# EAGLE board Feed Me Human! (EAGLE 9.7.0)

Size 181.78 x 142.44 mm. Coordinates in mm from the lower left corner, seen from the top.
Outline: 0,0 181.78,0 181.78,142.44 0,142.44 0,0
Copper layers (1*16): Top 0.035mm / dielectric 1.5mm / Bottom 0.035mm
Design rules "default": minimum track width 6mil, minimum drill 0.35mm, track to track 6mil, track to pad 6mil, pad to pad 6mil, via to via 6mil, smd to smd 6mil, copper to edge 40mil, drill to drill 6mil, minimum pad ring 10mil, minimum via ring 8mil, stop-mask expansion 4mil, vias tented up to drill 0mil, thermal gap 10mil

## Footprints (pad centres in the part's own frame; a part is rotated, then mirrored left to right if it is on the bottom)
LEDRD254W60D565H860B = drill 0.981 pad 1.581: 1 -1.27,0; 2 1.27,0
LEDRD254W60D565H860B_Y = drill 0.981 pad 1.581: 1 -1.27,0; 2 1.27,0
LEDRD254W60D565H860B_G = drill 0.981 pad 1.581: 1 -1.27,0; 2 1.27,0
PIEZO = drill 1 pad 1.6: 1 -3.5,0; 2 3.5,0
RESAD1016W63L850D250B = drill 0.83 pad 1.43: 1 -5.08,0; 2 5.08,0
HA-06-SM065 = drill 1 pad 1.676: 1 -2.54,-2.54; 2 0,2.54; 3 2.54,-2.54
SWITCH-MOMENTARY-PTH-6.5MM = drill 1.016 pad 1.88: 1 -3.251,2.261; 2 3.251,2.261; 3 -3.251,-2.261; 4 3.251,-2.261
SG90 = drill 1.016 long: 1 -2.54,0; 2 0,0; 3 2.54,0
ARDUINO-UNO-R3-SHIELD = drill 1.016 pad 1.88: 3.3V 24.13,-2.54; 5V 24.13,0; A0 24.13,12.7; A1 24.13,15.24; A2 24.13,17.78; A3 24.13,20.32; A4 24.13,22.86; A5 24.13,25.4; AREF -24.13,-13.97; D2 -24.13,20.32; D3 -24.13,17.78; D4 -24.13,15.24; D5 -24.13,12.7; D6 -24.13,10.16; D7 -24.13,7.62; D8 -24.13,3.81; D9 -24.13,1.27; D10 -24.13,-1.27; D11 -24.13,-3.81; D12 -24.13,-6.35; D13 -24.13,-8.89; GND@0 24.13,2.54; GND@1 24.13,5.08; GND@2 -24.13,-11.43; IOREF 24.13,-7.62; NC 24.13,-10.16; RES 24.13,-5.08; RX -24.13,25.4; SCL -24.13,-19.05; SDA -24.13,-16.51; TX -24.13,22.86; VIN 24.13,7.62
JHD-162A = drill 1.016 long: 1 -19.05,0; 2 -16.51,0; 3 -13.97,0; 4 -11.43,0; 5 -8.89,0; 6 -6.35,0; 7 -3.81,0; 8 -1.27,0; 9 1.27,0; 10 3.81,0; 11 6.35,0; 12 8.89,0; 13 11.43,0; 14 13.97,0; 15 16.51,0; 16 19.05,0

## Placement (x,y rotation side)
D1  RED  [LEDRD254W60D565H860B]  115.53,86.28 0 top
D2  YELLOW  [LEDRD254W60D565H860B_Y]  168.87,81.2 0 top
D3  GREEN  [LEDRD254W60D565H860B_G]  115.53,98.98 0 top
PIEZO1  PIEZO  [PIEZO]  166.33,101.52 0 top
R1  220  [RESAD1016W63L850D250B]  109.18,83.74 0 top
R2  1k  [RESAD1016W63L850D250B]  152.36,71.04 90 top
R3  10k  [RESAD1016W63L850D250B]  142.2,98.98 0 top
R4  220  [RESAD1016W63L850D250B]  109.18,93.9 0 top
R6  220  [RESAD1016W63L850D250B]  162.52,78.66 0 top
RPOT2  250k  [HA-06-SM065]  144.74,81.2 0 top
S1  SWITCH_MOMENTARY  [SWITCH-MOMENTARY-PTH-6.5MM]  134.58,90.09 90 top
SERVO2  SERVOSG90  [SG90]  106.39,135.45 180 top
U1  ARDUINO-UNO-R3-SHIELD  [ARDUINO-UNO-R3-SHIELD]  47.88,90.69 270 top
U4  LCD-16X2JHD-162A  [JHD-162A]  126.15,36.63 0 top

## Library data of the parts
D1 = Tinkercad; CATEGORY: Opto-Electronic; SUB-CATEGORY: LED; VALUE: LED_RED
D2 = Tinkercad; CATEGORY: Opto-Electronic; SUB-CATEGORY: LED; VALUE: LED_YELLOW
D3 = Tinkercad; CATEGORY: Opto-Electronic; SUB-CATEGORY: LED; VALUE: LED_GREEN
PIEZO1 R1-R4 R6 RPOT2 S1 SERVO2 U1 U4 = Tinkercad

## Nets
D1_A: D1.1 R1.2
D2_A: D2.1 R6.2
D3_A: D3.1 R4.2
U1_5V: R2.1 RPOT2.3 S1.1 S1.2 SERVO2.2 U1.5V U4.2
U1_A0: RPOT2.2 U1.A0
U1_D2: R3.1 S1.3 S1.4 U1.D2
U1_D3: U1.D3 U4.13
U1_D4: U1.D4 U4.12
U1_D5: U1.D5 U4.11
U1_D6: SERVO2.3 U1.D6
U1_D7: PIEZO1.1 U1.D7
U1_D8: R1.1 U1.D8
U1_D9: R4.1 U1.D9
U1_D10: U1.D10 U4.14
U1_D11: U1.D11 U4.6
U1_D12: U1.D12 U4.4
U1_D13: R6.1 U1.D13
U1_GND: D1.2 D2.2 D3.2 PIEZO1.2 R3.2 RPOT2.1 SERVO2.1 U1.GND@0 U1.GND@1 U1.GND@2 U4.1 U4.3 U4.5 U4.16
U4_LED+: R2.2 U4.15

## Tracks (layer width: path | path; a pad name or v marks a point on that pad's centre or on a via)
D1_A  (1 unrouted)
D2_A  (1 unrouted)
D3_A  (1 unrouted)
U1_5V  (6 unrouted)
U1_A0  (1 unrouted)
U1_D2  (3 unrouted)
U1_D3  (1 unrouted)
U1_D4  (1 unrouted)
U1_D5  (1 unrouted)
U1_D6  (1 unrouted)
U1_D7  (1 unrouted)
U1_D8  (1 unrouted)
U1_D9  (1 unrouted)
U1_D10  (1 unrouted)
U1_D11  (1 unrouted)
U1_D12  (1 unrouted)
U1_D13  (1 unrouted)
U1_GND  (13 unrouted)
U4_LED+  (1 unrouted)